# EAGLE board ME433_proto_board (EAGLE 5.12)
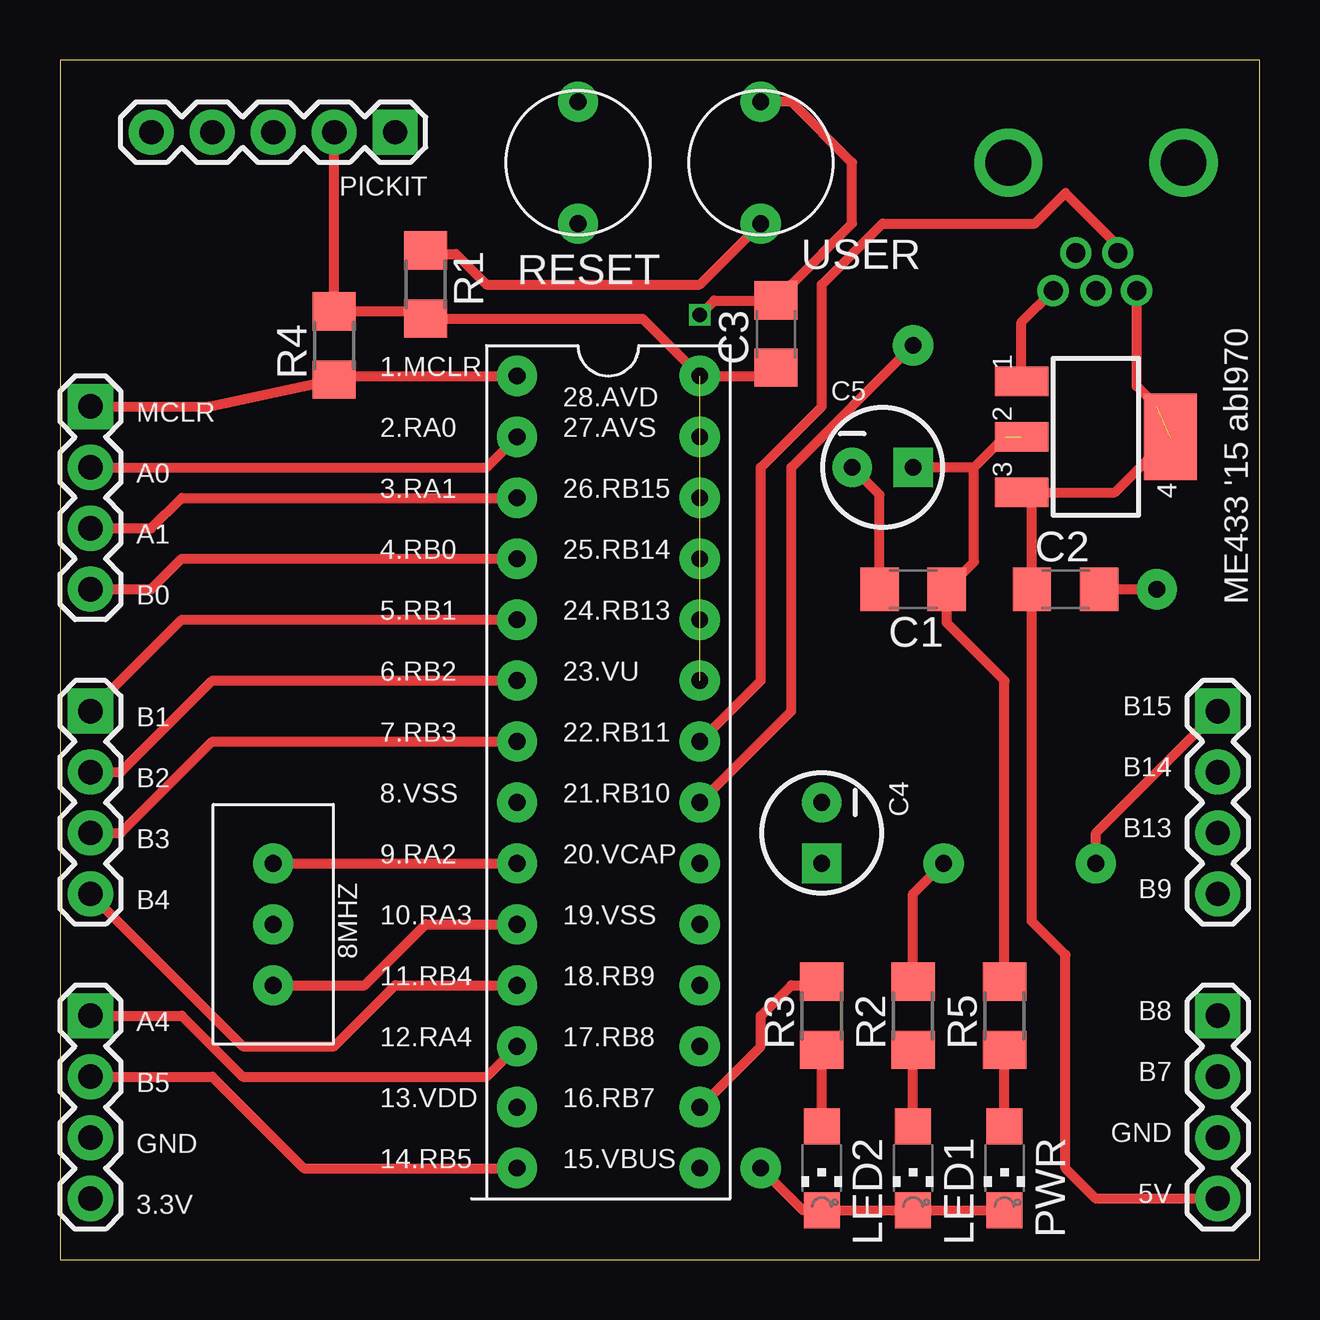
[diagram p0: board, top side]
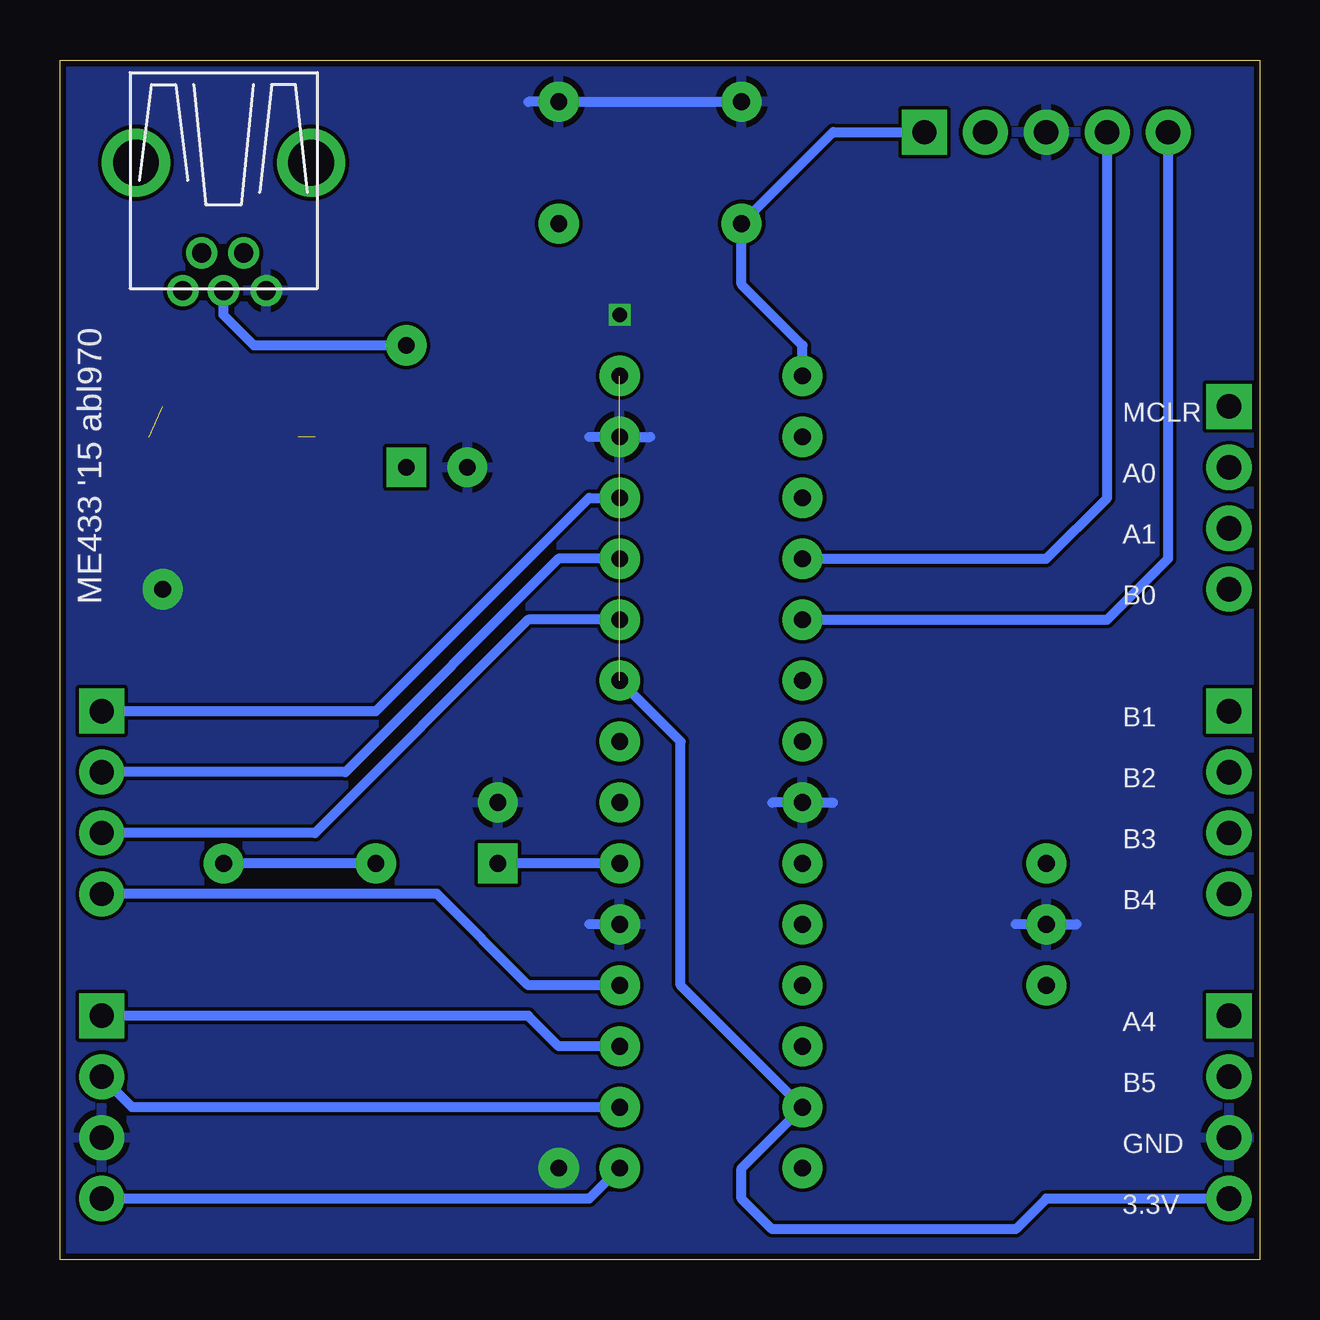
[diagram p1: board, bottom side, seen from below]

Size 50 x 50 mm. Coordinates in mm from the lower left corner, seen from the top.
Outline: 0,0 50,0 50,50 0,50 0,0
Copper layers (1*16): Top 0.035mm / dielectric 1.5mm / Bottom 0.035mm
Design rules "SeeedStudio_2layer_DRU_no_angle_20140221": minimum track width 6mil, minimum drill 12mil, track to track 6mil, track to pad 6mil, pad to pad 6mil, via to via 6mil, smd to smd 0mil, copper to edge 10mil, drill to drill 10mil, minimum pad ring 10mil, minimum via ring 6mil, stop-mask expansion 2mil, vias tented up to drill 100mil, thermal gap 10mil

## Footprints (pad centres in the part's own frame; a part is rotated, then mirrored left to right if it is on the bottom)
C1206 = smd 1.6 x 1.8: 1 -1.4,0; 2 1.4,0
CAP_POL_D = drill 0.7 pad 1.651 square: 1 1.27,0 | drill 0.7 pad 1.651 round: 2 -1.27,0
CHIPLED_1206 = smd 1.5 x 1.5: A 0,-1.75; C 0,1.75
1X05 = drill 1.016 pad 1.88 square: 1 0,0 | drill 1.016 pad 1.88 round: 2 2.54,0; 3 5.08,0; 4 7.62,0; 5 10.16,0
R1206 = smd 1.6 x 1.803: 1 -1.422,0; 2 1.422,0
BUTTON_.1 = drill 0.7 pad 1.676 round: 1 0,2.54; 2 0,-2.54
1X04 = drill 1.016 pad 1.88 square: 1 0,0 | drill 1.016 pad 1.88 round: 2 2.54,0; 3 5.08,0; 4 7.62,0
HEADERS_PIC32 = drill 0.7 pad 1.676 round: 1 1.27,34.29; 2 1.27,31.75; 3 1.27,29.21; 4 1.27,26.67; 5 1.27,24.13; 6 1.27,21.59; 7 1.27,19.05; 8 1.27,16.51; 9 1.27,13.97; 10 1.27,11.43; 11 1.27,8.89; 12 1.27,6.35; 13 1.27,3.81; 14 1.27,1.27; 15 8.89,1.27; 16 8.89,3.81; 17 8.89,6.35; 18 8.89,8.89; 19 8.89,11.43; 20 8.89,13.97; 21 8.89,16.51; 22 8.89,19.05; 23 8.89,21.59; 24 8.89,24.13; 25 8.89,26.67; 26 8.89,29.21; 27 8.89,31.75; 28 8.89,34.29
RESONATOR_8MHZ = drill 0.7 pad 1.676 round: 2 0,0; P1 0,2.54; P2 0,-2.54
SOT223 = smd 1.219 x 2.235: 1 -2.311,-3.099; 2 0,-3.099; 3 2.311,-3.099 | smd 3.6 x 2.2: 4 0,3.099
USB-MINIB = drill 0.8 round: D+ 4.064,0; D- 2.489,0.914; GND 4.064,-1.778; ID 2.489,-0.838; VBUS 4.064,1.702 | drill 1.9 round: P$6 -1.27,-3.65; P$7 -1.27,3.65

## Placement (x,y rotation side)
C1  0.1uF  [C1206]  35.56,27.94 180 top
C2  0.1uF  [C1206]  41.91,27.94 0 top
C3  0.1uF  [C1206]  29.84,38.58 90 top
C4  CAP_POL  [CAP_POL_D]  31.75,17.78 270 top
C5  CAP_POL  [CAP_POL_D]  34.29,33.02 0 top
LED1  [CHIPLED_1206]  35.56,3.81 180 top
LED2  [CHIPLED_1206]  31.75,3.81 180 top
PICKIT  1X05_HEADER  [1X05]  13.97,46.99 180 top
PWR  [CHIPLED_1206]  39.37,3.81 180 top
R1  10K  [R1206]  15.24,40.64 270 top
R2  330  [R1206]  35.56,10.16 90 top
R3  330  [R1206]  31.75,10.16 90 top
R4  10K  [R1206]  11.43,38.1 90 top
R5  330  [R1206]  39.37,10.16 90 top
RESET  BUTTON  [BUTTON_.1]  21.59,45.72 0 top
U$1  1X04_HEADER  [1X04]  1.27,35.56 270 top
U$2  1X04_HEADER  [1X04]  1.27,22.86 270 top
U$3  1X04_HEADER  [1X04]  48.26,22.86 270 top
U$4  1X04_HEADER  [1X04]  48.26,10.16 270 top
U$5  1X04_HEADER  [1X04]  1.27,10.16 270 top
U$6  PIC32_HEADER  [HEADERS_PIC32]  17.78,2.54 0 top
U$9  8MHZ  [RESONATOR_8MHZ]  8.89,13.97 0 top
U$10  REG_3.3V  [SOT223]  43.18,34.29 270 top
U$11  USB  [USB-MINIB]  43.18,44.45 270 top
USER  BUTTON  [BUTTON_.1]  29.21,45.72 180 top

## Library data of the parts
C1-C5 LED1 LED2 PICKIT PWR R1-R5 RESET U$6 U$9-U$11 USER = ME433_Austin
U$1-U$5 = ME433

## Nets
3.3V: C3.1 PICKIT.2 R1.2 R4.2 U$5.4 U$6.13 U$6.23 U$6.28
5V: C2.1 U$4.4 U$6.15 U$10.3 U$10.4 U$11.VBUS
A0: U$1.2 U$6.2
A1: U$1.3 U$6.3
A4: U$5.1 U$6.12
B0: PICKIT.4 U$1.4 U$6.4
B1: PICKIT.5 U$2.1 U$6.5
B2: U$2.2 U$6.6
B3: U$2.3 U$6.7
B4: U$2.4 U$6.11
B5: U$5.2 U$6.14
B7: R3.2 U$4.2 U$6.16
B8: U$4.1 U$6.17
B9: U$3.4 U$6.18
B13: U$3.3 U$6.24
B14: U$3.2 U$6.25
B15: R2.2 U$3.1 U$6.26
D+: U$6.21 U$11.D+
D-: U$6.22 U$11.D-
GND: C1.2 C2.2 C3.2 C4.2 C5.2 LED1.C LED2.C PICKIT.3 PWR.C RESET.1 U$4.3 U$5.3 U$6.8 U$6.19 U$6.27 U$9.2 U$10.1 U$11.GND USER.2
MCLR: PICKIT.1 R4.1 RESET.2 U$1.1 U$6.1
N$1: LED1.A R2.1
N$2: LED2.A R3.1
N$5: C1.1 C5.1 R5.2 U$10.2
N$6: PWR.A R5.1
N$43: C4.1 U$6.20
OSC1: U$6.9 U$9.P1
OSC2: U$6.10 U$9.P2
R13: R1.1 USER.1

## Tracks (layer width: path | path; a pad name or v marks a point on that pad's centre or on a via)
3.3V  (1 unrouted)
  Top 0.406: PICKIT.2 R4.2 14.94,39.52 R1.2 24.28,39.22 U$6.28 29.5,36.83 C3.1
  Bottom 0.406: U$5.4 8.89,2.54 10.16,1.27 20.32,1.27 21.59,2.54 21.59,3.81 U$6.13 24.13,11.43 24.13,21.59 U$6.23
5V  (1 unrouted)
  Top 0.406: U$11.VBUS 44.88,36.4 45.72,35.56 | 40.64,31.98 U$10.3 | 40.64,31.98 43.97,31.98 U$10.4 | 40.64,31.98 40.51,31.85 C2.1 40.51,14.1 41.91,12.7 41.91,3.81 43.18,2.54 U$4.4
  Bottom 0.406: U$4.4 27.94,2.54 U$6.15
A0
  Top 0.406: U$1.2 17.78,33.02 U$6.2
A1
  Top 0.406: U$1.3 3.81,30.48 5.08,31.75 U$6.3
A4
  Top 0.406: U$5.1 5.08,10.16 7.62,7.62 17.78,7.62 U$6.12
B0
  Top 0.406: U$1.4 3.81,27.94 5.08,29.21 U$6.4
  Bottom 0.406: PICKIT.4 6.35,31.75 8.89,29.21 U$6.4
B1
  Top 0.406: U$2.1 5.08,26.67 U$6.5
  Bottom 0.406: PICKIT.5 3.81,29.21 6.35,26.67 U$6.5
B2
  Top 0.406: U$2.2 2.54,20.32 6.35,24.13 U$6.6
B3
  Top 0.406: U$2.3 2.54,17.78 6.35,21.59 U$6.7
B4
  Top 0.406: U$6.11 13.97,11.43 11.43,8.89 7.62,8.89 U$2.4
B5
  Top 0.406: U$5.2 6.35,7.62 10.16,3.81 U$6.14
B7
  Top 0.406: U$6.16 29.21,8.89 29.21,10.16 30.48,11.43 31.6,11.43 R3.2
  Bottom 0.406: U$6.16 46.99,6.35 U$4.2
B8
  Bottom 0.406: U$6.17 29.21,8.89 30.48,10.16 U$4.1
B9
  Bottom 0.406: U$6.18 30.48,11.43 34.29,15.24 U$3.4
B13
  Bottom 0.406: U$6.24 30.48,26.67 39.37,17.78 U$3.3
B14
  Bottom 0.406: U$6.25 29.21,29.21 38.1,20.32 U$3.2
B15  (via drill 0.7 pad 1.68)
  Top 0.406: R2.2 35.56,15.24 v36.83,16.51 | v43.18,16.51 43.18,17.78 U$3.1
  Bottom 0.406: U$6.26 27.94,31.75 36.83,22.86 U$3.1 | v36.83,16.51 v43.18,16.51
D+  (via drill 0.7 pad 1.68)
  Top 0.406: v35.56,38.1 30.48,33.02 30.48,22.86 U$6.21
  Bottom 0.406: U$11.D+ 43.18,39.37 41.91,38.1 v35.56,38.1
D-
  Top 0.406: U$11.D- 44.09,42.27 41.91,44.45 40.64,43.18 34.29,43.18 31.75,40.64 31.75,35.56 29.21,33.02 29.21,24.13 U$6.22
GND  (via drill 0.6, 0.7 pad 1.68)
  Top 0.406: PWR.C LED1.C LED2.C 30.96,2.06 v29.21,3.81 | C1.2 34.16,31.88 C5.2 | U$10.1 40.08,39.06 U$11.GND | USER.2 30.48,48.26 33.02,45.72 33.02,43.18 30.48,40.64 30.48,40.61 C3.2 27.28,39.98 v26.67,39.37 | C2.2 v45.72,27.94
  Bottom 0.406: RESET.1 USER.2 30.48,48.26 | 10.16,13.97 U$9.2 7.62,13.97 | 17.78,19.05 U$6.8 20.32,19.05 | U$6.19 27.94,13.97 | 27.94,34.29 U$6.27 25.4,34.29
  pour Bottom: -3.81,52.07 -3.81,-2.54 52.07,-2.54 52.07,53.34 1.27,53.34 1.27,54.61
MCLR
  Top 0.406: U$1.1 6.2,35.56 R4.1 11.43,36.83 U$6.1
  Bottom 0.406: U$6.1 19.05,38.1 21.59,40.64 RESET.2 17.78,46.99 PICKIT.1
N$1
  Top 0.406: LED1.A R2.1
N$2
  Top 0.406: LED2.A R3.1
N$5  (1 unrouted)
  Top 0.406: 38.1,33.02 C5.1 | 38.1,33.02 39.37,34.29 | 38.1,33.02 38.1,29.08 C1.1 36.96,26.54 39.37,24.13 R5.2
N$6
  Top 0.406: PWR.A R5.1 | PWR.A
N$43
  Bottom 0.406: U$6.20 C4.1
OSC1
  Top 0.406: U$9.P1 U$6.9
OSC2
  Top 0.406: U$9.P2 12.7,11.43 15.24,13.97 U$6.10
R13
  Top 0.406: USER.1 26.67,40.64 17.78,40.64 16.51,41.91 15.39,41.91 R1.1

## Text on the board
tPlace: MCLR | A0 | A1 | B0 | ME433 '15 abl970 | B15 | B1 | B14 | B2 | B13 | B3 | B9 | B4 | B8 | A4 | B7 | B5 | GND | GND | 5V | 3.3V
bPlace: MCLR | A0 | A1 | B0 | ME433 '15 abl970 | B1 | B2 | B3 | B4 | A4 | B5 | GND | 3.3V